# Altium PCB LED_BAT_breakout.PcbDoc
Units mil, origin at the board's own origin, x right, y up, seen from the top; angles counter-clockwise.
Board outline 629.92 x 275.59 mil, 2 copper layers (Top Layer, Bottom Layer); 2 components, 4 nets, 8 pads, 0 vias.
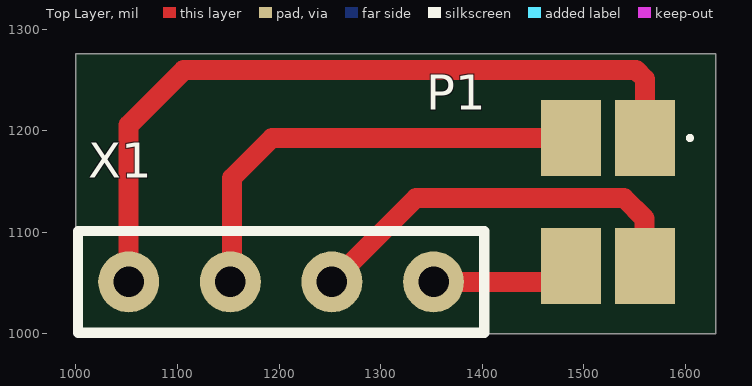
[diagram p0: Top Layer view]
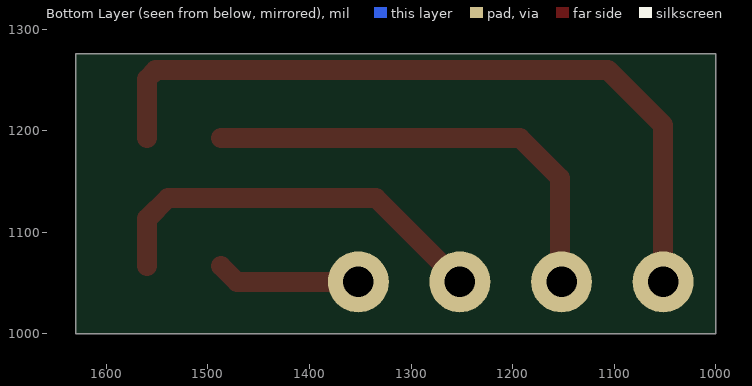
[diagram p1: Bottom Layer view, seen from below]

## Layer stack, top to bottom
Top Solder: solder mask 0.4, Solder Resist, Dk 3.5
Top Layer: signal copper 1.4
Dielectric 1: dielectric 12.6, FR-4, Dk 4.8
Bottom Layer: signal copper 1.4
Bottom Solder: solder mask 0.4, Solder Resist, Dk 3.5

## Board outline
1000,1000 1000,1275.59 1629.92,1275.59 1629.92,1000

## Design rules (kind name [scope] priority, off if disabled: settings)
Clearance [All] p1: gap=10 ignorepadtopadclearanceinfootprint=FALSE except(0: Arc-Hole Track-Hole SMDPad-Hole THPad-Hole Via-Hole Fill-Hole Poly-Hole Region-Hole Text-Hole)
PolygonConnect [All] p1: connectstyle=Relief reliefconductorwidth=10 reliefentries=4 polygonreliefangle="90 Angle" airgapwidth=10
RoutingVias [All] p1: holewidth=28 width=50 viastyle="Through Hole" minholewidth=28 minwidth=50 maxholewidth=28 maxwidth=50
SolderMaskExpansion [All] p1: expansion=4 istentingtop=FALSE
Width [All] p1: maxlimit=100 minlimit=10 preferedwidth=10 minimp=50.000000 maximp=50.000000 favimp=50.000000
30 further rules are at their usual default settings.

## Components (designator, comment, footprint, x,y, rotation, side; value= is the part's Value field where it differs from the comment)
P1 "598-8610-207F" 5988610207F 1523.62,1129.92 r270 top
X1 "JST" "Header 4pin 2,54mm" 1251.97,1051.18 r90 top

## Footprints (in the part's own frame and the unit in brackets; to place one, negate y for a bottom-side part, rotate by r counter-clockwise, add the part's x,y. Pads: shape width x height; smd on the part's side, far side on the other; paste and mask are expansions set on the pad)
5988610207F [mm]
  rect 1.9x1.5 smd: 1(-1.6,0.925) 2(1.6,0.925) 3(-1.6,-0.925) 4(1.6,-0.925)
  silkscreen extent -1.65,2 -1.55,2.1, body extent -1.6,-1.35 1.6,1.35, height 0.9
"Header 4pin 2,54mm" [mil]
  round 60 hole 30: 1(0,200) 2(0,100) 3(0,0) 4(0,-100)
  silkscreen extent -50,-150 50,250, body extent -50,-150 50,250, height 272

## Part data
P1: "LED", Manufacturer_Name=Dialight, Mouser Part Number=645-598-8610-207F, Arrow Part Number=598-8610-207F, Arrow Price/Stock=https://www.arrow.com/en/products/598-8610-207f/dialight?region=nac, Datasheet Link=https://media.digikey.com/pdf/Data%20Sheets/Dialight%20PDFs/598%20Series%201210%20Pkg%20Bi-Color.pdf, Height=0.8mm, Manufacturer_Part_Number=598-8610-207F, Mouser Price/Stock=https://www.mouser.co.uk/ProductDetail/Dialight/598-8610-207F?qs=7JStj%2FjQ2SFuCjosqwklHQ%3D%3D
X1: library part B4B-XH-AM__LF__SN_, "Connector", Arrow Part Number="B4B-XH-AM (LF)(SN)", Manufacturer_Name="JST (JAPAN SOLDERLESS TERMINALS)", Arrow Price/Stock=https://www.arrow.com/en/products/b4b-xh-am-lf-sn/jst-manufacturing?region=europe, Datasheet Link=http://www.jst-mfg.com/product/pdf/eng/eXH.pdf, Height=7mm, Manufacturer_Part_Number="B4B-XH-AM (LF)(SN)"

## Nets (pads, with @x,y where several pads share a name; then routed paths per layer and width w, separated by ;. In a path a pad name is that pad's centre, name@x,y a point inside that pad or via, vN(x,y) a via of type N, cw(c..) or ccw(c..) an arc to the next point about the centre after c; other vN are vias at no path point)
NetP1_1: P1.1 X1.1 | length 746.5
  Top Layer w19.68: X1.1 1051.97,1205.51 1106.09,1259.64 1551.39,1259.64 1560.04,1250.98 P1.1
NetP1_2: P1.2 X1.3 | length 397.1
  Top Layer w19.68: X1.3 1334.65,1133.86 1539.37,1133.86 1559.76,1113.47 1559.76,1067.21 P1.2
NetP1_3: P1.3 X1.2 | length 453
  Top Layer w19.68: X1.2 1153.54,1052.76 1153.54,1153.54 1192.91,1192.91 P1.3
NetP1_4: P1.4 X1.4 | length 141.8
  Top Layer w19.68: X1.4 1471.46,1051.18 P1.4

## Silkscreen, mask and mechanical layers (free items; w line width, h text height)
Board Shape:
  the board outline again, w10

## Dimensions
1000,1275.59 to 1001.97,1001.18 on Dimensions
1000,1275.59 to 1629.92,1275.59 on Dimensions